# Altium PCB Rotating Dispaly.PcbDoc
Units mm, origin at the board's own origin, x right, y up, seen from the top; angles counter-clockwise.
Board outline 294.3 x 53.8 mm, 2 copper layers (Top Layer, Bottom Layer); 77 components, 100 nets, 307 pads, 34 vias.
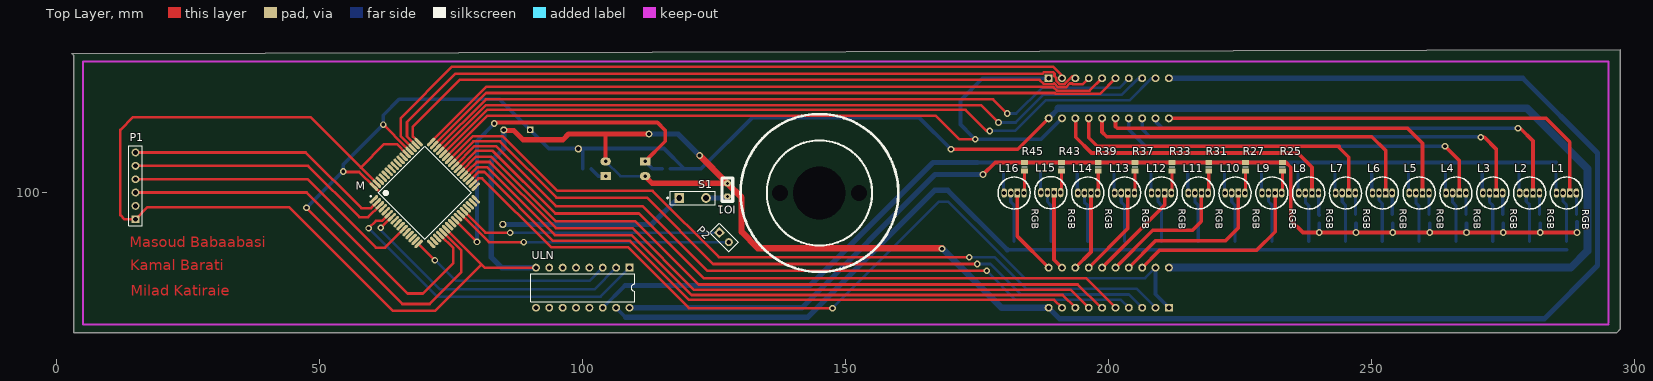
[diagram p0: Top Layer view]
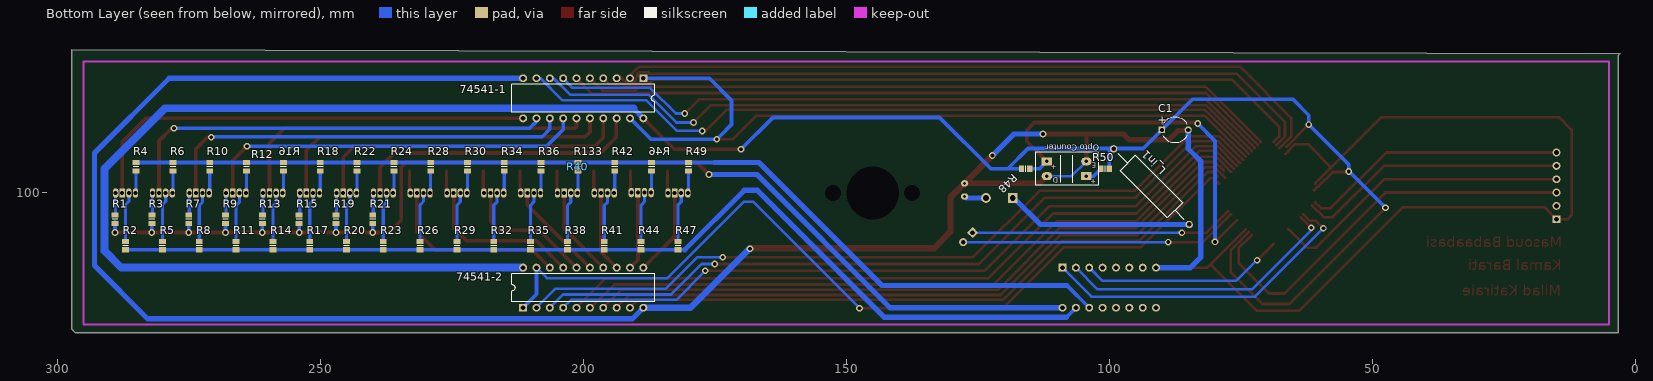
[diagram p1: Bottom Layer view, seen from below]

## Layer stack, top to bottom
Top Solder: solder mask 0.0102, Solder Resist, Dk 3.5
Top Layer: signal copper 0.0356
Dielectric1: dielectric 0.32, FR-4, Dk 4.8
Bottom Layer: signal copper 0.0356
Bottom Solder: solder mask 0.0102, Solder Resist, Dk 3.5

## Board outline
2.9,126.5 3.3,126.1 3.3,73.4 296.5,73.4 297.2,74.1 297.2,127.2

## Design rules (kind name [scope] priority, off if disabled: settings)
Clearance [All] p1: gap=0.12 ignorepadtopadclearanceinfootprint=FALSE except(0: Arc-Hole Track-Hole SMDPad-Hole THPad-Hole Via-Hole Fill-Hole Poly-Hole Region-Hole Text-Hole)
ComponentClearance [All] p1 off: gap=0.254 collisioncheckmode=3 verticalgap=0.254 showdistances=FALSE
PolygonConnect [All] p1: connectstyle=Relief reliefconductorwidth=0.254 reliefentries=4 polygonreliefangle="90 Angle" airgapwidth=0.254
RoomDefinition Schematic [InComponentClass('Schematic')] p1: confinementstyle=ConfineIn formatcopy=TRUE lockcomponents=FALSE outline 4.2,74.6 295.7,74.6 295.7,125.7 4.2,125.7
RoutingVias [All] p1: holewidth=0.6 width=1.2 viastyle="Through Hole" minholewidth=0.5 minwidth=1 maxholewidth=0.7 maxwidth=1.4
SilkToSolderMaskClearance SilkscreenOverComponentPads [IsPad] p1: minsilkscreentomaskgap=0.254 clearancetoexposedcopper=TRUE
SolderMaskExpansion [All] p1: expansion=0.102 istentingtop=FALSE
Width [All] p1: maxlimit=3 minlimit=0.2 preferedwidth=0.5
28 further rules are at their usual default settings.

## Classes and differential pairs
component class Schematic: 74541-1 74541-2 C1 IO1 L1 L2 L3 L4 L5 L6 L7 L8 L9 L10 L11 L12 L13 L14 L15 L16 L_in1 M

## Components (designator, comment, footprint, x,y, rotation, side; value= is the part's Value field where it differs from the comment)
74541-1 "74541(Bufer)" SOT146-1 200,118 r0 bottom
74541-2 "74541(Bufer)" SOT146-1 200,82 r180 bottom
C1 "Cap Pol1" CAPPR5-5x5 87.5,112 r180 bottom
IO1 "I/O Port" I/O 127.508,100.584 r180 top
L1 "RGB LED" "RGB LED" 287,100 r270 top
L2 "RGB LED" "RGB LED" 280,100 r270 top
L3 "RGB LED" "RGB LED" 273,100 r270 top
L4 "RGB LED" "RGB LED" 266,100 r270 top
L5 "RGB LED" "RGB LED" 259,100 r270 top
L6 "RGB LED" "RGB LED" 252,100 r270 top
L7 "RGB LED" "RGB LED" 245,100 r270 top
L8 "RGB LED" "RGB LED" 238,100 r270 top
L9 "RGB LED" "RGB LED" 231,100 r270 top
L10 "RGB LED" "RGB LED" 224,100 r270 top
L11 "RGB LED" "RGB LED" 217,100 r270 top
L12 "RGB LED" "RGB LED" 210,100 r270 top
L13 "RGB LED" "RGB LED" 203,100 r270 top
L14 "RGB LED" "RGB LED" 196,100 r270 top
L15 "RGB LED" "RGB LED" 188.976,100.076 r270 top
L16 "RGB LED" "RGB LED" 182,100 r270 top
L_in1 "Inductor" AXIAL-0.8 92,101.2 r225 bottom
M "AVR micro" 64A_M 70,100 r45 top
"Opto Counter1" "Opto Conter" "Opto Counter" 108.1,104.6 r0 bottom
P1 "Programing" HDR1X6 15,95 r90 top
P2 "USART" HDR1X2 125.984,92.456 r315 top
R1 "Res Semi" RESC2012L 289,95 r90 bottom
R2 "Res Semi" RESC2012L 287,90 r90 bottom
R3 "Res Semi" RESC2012L 282,95 r90 bottom
R4 "Res Semi" RESC2012L 285,105 r270 bottom
R5 "Res Semi" RESC2012L 280,90 r90 bottom
R6 "Res Semi" RESC2012L 278,105 r270 bottom
R7 "Res Semi" RESC2012L 275,95 r90 bottom
R8 "Res Semi" RESC2012L 273,90 r90 bottom
R9 "Res Semi" RESC2012L 268,95 r90 bottom
R10 "Res Semi" RESC2012L 271,105 r270 bottom
R11 "Res Semi" RESC2012L 266,90 r90 bottom
R12 "Res Semi" RESC2012L 264,105 r270 bottom
R13 "Res Semi" RESC2012L 261,95 r90 bottom
R14 "Res Semi" RESC2012L 259,90 r90 bottom
R15 "Res Semi" RESC2012L 254,95 r90 bottom
R16 "Res Semi" RESC2012L 257,105 r270 bottom
R17 "Res Semi" RESC2012L 252,90 r90 bottom
R18 "Res Semi" RESC2012L 250,105 r270 bottom
R19 "Res Semi" RESC2012L 247,95 r90 bottom
R20 "Res Semi" RESC2012L 245,90 r90 bottom
R21 "Res Semi" RESC2012L 240,95 r90 bottom
R22 "Res Semi" RESC2012L 243,105 r270 bottom
R23 "Res Semi" RESC2012L 238,90 r90 bottom
R24 "Res Semi" RESC2012L 236,105 r270 bottom
R25 "Res Semi" RESC2012L 233,105 r270 top
R26 "Res Semi" RESC2012L 231,90 r90 bottom
R27 "Res Semi" RESC2012L 226,105 r270 top
R28 "Res Semi" RESC2012L 229,105 r270 bottom
R29 "Res Semi" RESC2012L 224,90 r90 bottom
R30 "Res Semi" RESC2012L 222,105 r270 bottom
R31 "Res Semi" RESC2012L 219,105 r270 top
R32 "Res Semi" RESC2012L 217,90 r90 bottom
R33 "Res Semi" RESC2012L 212,105 r270 top
R34 "Res Semi" RESC2012L 215,105 r270 bottom
R35 "Res Semi" RESC2012L 210,90 r90 bottom
R36 "Res Semi" RESC2012L 208,105 r270 bottom
R37 "Res Semi" RESC2012L 205,105 r270 top
R38 "Res Semi" RESC2012L 203,90 r90 bottom
R39 "Res Semi" RESC2012L 198,105 r270 top
R40 "Res Semi" RESC2012L 201,105 r270 bottom
R41 "Res Semi" RESC2012L 196,90 r90 bottom
R42 "Res Semi" RESC2012L 194,105 r270 bottom
R43 "Res Semi" RESC2012L 191,105 r270 top
R44 "Res Semi" RESC2012L 189,90 r90 bottom
R45 "Res Semi" RESC2012L 184,105 r270 top
R46 "Res Semi" RESC2012L 187,105 r270 bottom
R47 "Res Semi" RESC2012L 182,90 r90 bottom
R48 "Res Semi" RESC2012L 115.9,104.6 r0 bottom
R49 "Res Semi" RESC2012L 180,105 r270 bottom
R50 "Res Semi" RESC2012L 100.8,104.6 r0 bottom
S1 "SW-SPST" SPST-2 120.904,99.06 r0 top
ULN "ULN2003" A16 100,82 r180 top

## Footprints (in the part's own frame and the unit in brackets; to place one, negate y for a bottom-side part, rotate by r counter-clockwise, add the part's x,y. Pads: shape width x height; smd on the part's side, far side on the other; paste and mask are expansions set on the pad)
64A_M [mm] "Thin QFP, 64-Leads, Body 14x14mm, Pitch 0.8mm, IPC Low Density"
  oval 2.05x0.6 smd: 1(-7.7,6) 2(-7.7,5.2) 3(-7.7,4.4) 4(-7.7,3.6) 5(-7.7,2.8) 6(-7.7,2) 7(-7.7,1.2) 8(-7.7,0.4) 9(-7.7,-0.4) 10(-7.7,-1.2) 11(-7.7,-2) 12(-7.7,-2.8) 13(-7.7,-3.6) 14(-7.7,-4.4) 15(-7.7,-5.2) 16(-7.7,-6) 33(7.7,-6) 34(7.7,-5.2) 35(7.7,-4.4) 36(7.7,-3.6) 37(7.7,-2.8) 38(7.7,-2) 39(7.7,-1.2) 40(7.7,-0.4) 41(7.7,0.4) 42(7.7,1.2) 43(7.7,2) 44(7.7,2.8) 45(7.7,3.6) 46(7.7,4.4) 47(7.7,5.2) 48(7.7,6)
  oval 0.6x2.05 smd: 17(-6,-7.7) 18(-5.2,-7.7) 19(-4.4,-7.7) 20(-3.6,-7.7) 21(-2.8,-7.7) 22(-2,-7.7) 23(-1.2,-7.7) 24(-0.4,-7.7) 25(0.4,-7.7) 26(1.2,-7.7) 27(2,-7.7) 28(2.8,-7.7) 29(3.6,-7.7) 30(4.4,-7.7) 31(5.2,-7.7) 32(6,-7.7) 49(6,7.7) 50(5.2,7.7) 51(4.4,7.7) 52(3.6,7.7) 53(2.8,7.7) 54(2,7.7) 55(1.2,7.7) 56(0.4,7.7) 57(-0.4,7.7) 58(-1.2,7.7) 59(-2,7.7) 60(-2.8,7.7) 61(-3.6,7.7) 62(-4.4,7.7) 63(-5.2,7.7) 64(-6,7.7)
  silkscreen extent -7.82,-6.25 6.25,6.97, body extent -7,-7 7,7, height 1.2
A16 [mm] "DIP; 16 Leads; Row Spacing 7.62 mm; Pitch 2.54 mm"
  rect 1.5x1.5 hole 0.9: 1(-8.89,-3.81)
  round 1.5 hole 0.9: 2(-6.35,-3.81) 3(-3.81,-3.81) 4(-1.27,-3.81) 5(1.27,-3.81) 6(3.81,-3.81) 7(6.35,-3.81) 8(8.89,-3.81) 9(8.89,3.81) 10(6.35,3.81) 11(3.81,3.81) 12(1.27,3.81) 13(-1.27,3.81) 14(-3.81,3.81) 15(-6.35,3.81) 16(-8.89,3.81)
  silkscreen extent -9.85,-2.65 9.85,2.65
AXIAL-0.8 [mm]
  round 1.4 hole 0.85: 1(-10.16,0) 2(10.16,0)
  silkscreen extent -8.89,-2.03 8.89,2.03
CAPPR5-5x5 [mm] "Capacitor, Electrolytic, Radial; Body 5 x 5 mm (Dia.xH typ); Pin Spacing 5 mm (typ)"
  rect 1.25x1.25 hole 0.75: 1(-2.5,0)
  round 1.35 hole 0.8: 2(2.5,0)
  silkscreen extent -2.26,-2.5 2.27,2.5
HDR1X2 [mm] "Connector; Header; 2 Position"
  rect 1.5x1.5 hole 0.9: 1(0,0)
  round 1.5 hole 0.9: 2(2.54,0)
  silkscreen extent -1.27,-1.27 3.81,1.27
HDR1X6 [mm] "Connector; Header; 6 Position"
  rect 1.5x1.5 hole 0.9: 1(0,0)
  round 1.5 hole 0.9: 2(2.54,0) 3(5.08,0) 4(7.62,0) 5(10.16,0) 6(12.7,0)
  silkscreen extent -1.27,-1.27 13.97,1.27
I/O [mm]
  oval 1.4x1.2 hole 0.6: 1(0,1.25) 2(0,-1.25)
  silkscreen extent -1,-2.29 1,2.16
"Opto Counter" [mm]
  rect 2x1.5 hole 0.65: 1(-3.75,1.4) 3(3.75,-1.4)
  oval 2x1.5 hole 0.65: 2(-3.75,-1.4) 4(3.75,1.4)
  silkscreen extent -6,-3.15 6,3.15
RESC2012L [mm] "Chip Resistor, Body 2.0x1.3mm, IPC High Density"
  rect 1x1.3 smd: 1(-0.8,0) 2(0.8,0)
  silkscreen extent 0,-0.55 0,0.55, body extent -1.07,-0.7 1.07,0.7, height 2.54
"RGB LED" [mm]
  oval 1.8x1.02 hole 0.762: 1(0,1.88) 3(0,-0.63) 4(0,-1.88)
  rect 1.8x1.02 hole 0.762: 2(0,0.63)
  silkscreen extent -3.05,-3.05 3.05,3.05
SOT146-1 [mm] "DIP; 20 Leads; Row Spacing 7.62 mm; Pitch 2.54 mm"
  rect 1.5x1.5 hole 0.9: 1(-11.43,-3.81)
  round 1.5 hole 0.9: 2(-8.89,-3.81) 3(-6.35,-3.81) 4(-3.81,-3.81) 5(-1.27,-3.81) 6(1.27,-3.81) 7(3.81,-3.81) 8(6.35,-3.81) 9(8.89,-3.81) 10(11.43,-3.81) 11(11.43,3.81) 12(8.89,3.81) 13(6.35,3.81) 14(3.81,3.81) 15(1.27,3.81) 16(-1.27,3.81) 17(-3.81,3.81) 18(-6.35,3.81) 19(-8.89,3.81) 20(-11.43,3.81)
  silkscreen extent -13.6,-2.65 13.6,2.65
SPST-2 [mm] "Circuit Breaker; 2 Leads"
  rect 1.85x1.85 hole 1.1: 1(-2.54,0)
  round 1.85 hole 1.1: 2(2.54,0)
  silkscreen extent -4.89,-1.27 4.28,1.27

## Part data
C1: "Polarized Capacitor (Radial)"
M: library part ATmega64
"Opto Counter1": library part "Opto Counter"
P1: library part "Header 6", "Header, 6-Pin"
P2: library part "Header 2", "Header, 2-Pin"
R1 R2 R3 R4 R5 R6 R7 R8 R9 R10 R11 R12 R13 R14 R15 R16 R17 R18 R19 R20 R21 R22 R23 R24 R25 R26 R27 R28 R29 R30 R31 R32 R33 R34 R35 R36 R37 R38 R39 R40 R41 R42 R43 R44 R45 R46 R47 R48 R49 R50: "Semiconductor Resistor"
S1: "Single-Pole, Single-Throw Switch"

## Free pads (board coordinates)
  round 0 hole 10: 0(145,100)
  round 0 hole 3: 1(152.5,100) 2(137.5,100)

## Via types
v1: diameter 1.27, hole 0.711, Top Layer to Bottom Layer, 34 vias

## Nets (pads, with @x,y where several pads share a name; then routed paths per layer and width w, separated by ;. In a path a pad name is that pad's centre, name@x,y a point inside that pad or via, vN(x,y) a via of type N, cw(c..) or ccw(c..) an arc to the next point about the centre after c; other vN are vias at no path point)
B: R4.1 R6.1 R10.1 R12.1 R16.1 R18.1 R22.1 R24.1 R28.1 R30.1 R34.1 R36.1 R40.1 R42.1 R46.1 R49.1 ULN.14 | length 192.6
  Bottom Layer w0.7: ULN.14 108.02,82.4 ; 175,105.8 R49.1 R42.1 R22.1 R18.1 R16.1 R12.1 R10.1 R6.1 R4.1
  Bottom Layer w1: 108.02,82.4 143.2,82.4 166.6,105.8 175,105.8
BD: M.16 ULN.3 | length 39
  Top Layer w0.5: M.16 v1@71.905,87.205
  Bottom Layer w0.5: v1@71.9,87.3 75.9,83.3 101.3,83.3 ULN.3
  other v1: 71.9,87.2
G: R2.1 R5.1 R8.1 R11.1 R14.1 R17.1 R20.1 R23.1 R26.1 R29.1 R32.1 R35.1 R38.1 R41.1 R44.1 R47.1 ULN.15 | length 196.1
  Bottom Layer w0.7: ULN.15 108.14,76.4 ; 180.7,89.2 R47.1 R44.1 R41.1 R38.1 R35.1 R32.1 R29.1 R26.1 R23.1 R20.1 R17.1 R14.1 R11.1 R8.1 R5.1 R2.1
  Bottom Layer w1: 108.14,76.4 142.8,76.4 166.9,100.5 169.4,100.5 180.7,89.2
GD: M.7 ULN.2 | length 54.4
  Top Layer w0.5: v1(61.6,93.4) 61.632,93.4 M.7@63.636,95.404
  Bottom Layer w0.5: v1(61.6,93.4) 61.6,93 72.9,81.7 102.24,81.7 ULN.2
GND: 74541-1.10 74541-2.10 "Opto Counter1.2" "Opto Counter1.4" C1.2 IO1.2 M.22 M.53 M.63 P1.1 ULN.8 | length 589
  Top Layer w0.5: M.63 57.811,104.836 ; M.53 64.68,109.28 62.255,109.28 57.811,104.836 ; M.22 81.362,85.81 ULN.8 ; 80.736,86.436 71.9,77.6 63.9,77.6 44.2,97.3 17.3,97.3 P1.1 12.9,95 12.1,95.8 12.1,112 14.5,114.4 48.246,114.4 57.811,104.836 ; 104.35,111.15 104.45,111.15
  Top Layer w0.7: 104.35,106 104.35,111.15
  Top Layer w1: C1.2@85.4,111.9 86.9,111.9 88.7,110.1 96.2,110.1 97.3,111.2 v1(112.6,111.2) ; 111.85,103.2 113.216,101.834 IO1.2
  Top Layer w1.2: v1(122.221,107.121) IO1.2 130.2,99.142 130.2,92.6 133.3,89.5 v1@168.3,89.5
  Bottom Layer w0.5: 104.35,106 107.15,103.2 111.85,103.2
  Bottom Layer w1: C1.2 85,108.4 82.6,106 82.6,87.8 84.59,85.81 ULN.8 ; v1(112.6,111.2) 118.142,111.2 v1(122.221,107.121) ; 74541-2.10 190.66,76.1 282.8,76.1 292.9,86.2 292.9,107.6 278.69,121.81 74541-1.10
  Bottom Layer w1.2: v1@168.35,89.45 179.61,78.19 74541-2.10
  other v1: 168.3,89.4
L5: 74541-1.15 L5.2 | length 70.7
  Top Layer w0.7: 74541-1.15 201.27,112.63 201.6,112.3 256.8,112.3 259.63,109.47 L5.2
L6: 74541-1.16 L6.2 | length 66
  Top Layer w0.7: 74541-1.16 198.73,111.57 199.6,110.7 250,110.7 252.63,108.07 L6.2
L8: 74541-1.18 L8.2 | length 55.8
  Top Layer w0.7: 74541-1.18 193.7,114.14 193.7,110.6 196.7,107.6 235.9,107.6 238.63,104.87 L8.2
MISO: M.3 P1.5 | length 51.4
  Top Layer w0.5: P1.5 47.817,105.16 57.577,95.4 59.177,95.4 M.3
MOSI: M.2 P1.6 | length 50.7
  Top Layer w0.5: P1.6 47.346,107.7 57.946,97.1 59.746,97.1 M.2
Net74541-1_1: 74541-1.1 74541-1.19 M.43 | length 150.9
  Top Layer w0.5: M.43 81.872,114.7 167.1,114.7 171.6,110.2 v1(174.6,110.2)
  Bottom Layer w0.5: 174,110.8 v1(174.6,110.2)
  Bottom Layer w0.7: 174,110.8 171.8,113 171.8,117.6 176.01,121.81 74541-1.1 ; v1(174.6,110.2) 187.12,110.2 74541-1.19
Net74541-1_2: 74541-1.2 M.51 | length 137.5
  Top Layer w0.5: M.51 65.4,110.823 65.4,114.2 75.2,124 189.4,124 191.11,122.29 74541-1.2
Net74541-1_3: 74541-1.3 M.50 | length 138.4
  Top Layer w0.5: M.50 66.6,110.754 66.6,113.5 75.8,122.7 187.437,122.7 187.667,122.93 189.473,122.93 189.69,122.713 189.69,122.2 189.99,121.9 189.99,121.346 190.646,120.69 191.574,120.69 193.084,122.2 193.26,122.2 74541-1.3
Net74541-1_4: 74541-1.4 M.49 | length 137.1
  Top Layer w0.5: M.49 68.756,109.687 67.7,110.744 67.7,112.6 76.6,121.5 186.857,121.5 187.667,120.69 189.473,120.69 189.603,120.82 189.639,120.82 190.389,120.07 191.831,120.07 192.561,120.8 193.076,120.8 193.186,120.69 195.07,120.69 74541-1.4
Net74541-1_5: 74541-1.5 M.48 | length 133.2
  Top Layer w0.5: M.48 81.715,120.2 187.28,120.2 187.41,120.07 189.512,120.07 190.132,119.45 196.37,119.45 74541-1.5
Net74541-1_6: 74541-1.6 M.47 | length 134.9
  Top Layer w0.5: M.47 81.646,119 189.706,119 189.876,118.83 198.29,118.83 74541-1.6
Net74541-1_7: 74541-1.7 M.46 | length 139.2
  Top Layer w0.5: M.46 81.577,117.8 178,117.8 v1(180.7,115.1)
  Bottom Layer w0.5: v1(180.7,115.1) 182.4,115.1 187.3,120 202,120 74541-1.7
Net74541-1_8: 74541-1.8 M.45 | length 141.9
  Top Layer w0.5: M.45 81.609,116.7 175.75,116.7 v1(179.05,113.4)
  Bottom Layer w0.5: v1(179.05,113.4) 182.3,113.4 187.6,118.7 202.5,118.7 205.61,121.81 74541-1.8
Net74541-1_9: 74541-1.9 M.44 | length 145
  Top Layer w0.5: M.44 81.84,115.8 172.774,115.8 176.774,111.8 177.087,112.113 v1(177.4,111.8)
  Bottom Layer w0.5: v1(177.4,111.8) 182.2,111.8 188,117.6 203.9,117.6 208.11,121.81 74541-1.9
Net74541-1_11: 74541-1.11 L1.2 | length 87.7
  Top Layer w0.7: 74541-1.11 283.11,114.19 287.63,109.67 L1.2
Net74541-1_12: 74541-1.12 L2.2 | length 83.8
  Top Layer w0.7: v1(277.8,112.3) 278.2,112.3 280.63,109.87 L2.2
  Bottom Layer w0.7: 74541-1.12 208.89,113.61 210.2,112.3 v1@277.9,112.3
Net74541-1_13: 74541-1.13 L3.2 | length 79.2
  Top Layer w0.7: v1(270.7,110.6) 271.4,110.6 273.63,108.37 L3.2
  Bottom Layer w0.7: 74541-1.13 206.35,112.15 207.8,110.7 v1@270.7,110.7
Net74541-1_14: 74541-1.14 L4.2 | length 73.5
  Top Layer w0.7: v1(263.9,108.9) 266.63,106.17 L4.2
  Bottom Layer w0.7: 74541-1.14 203.81,112.09 207,108.9 v1(263.9,108.9)
Net74541-1_17: 74541-1.17 L7.2 | length 61.4
  Top Layer w0.7: 74541-1.17 196.19,110.51 198.1,108.6 ; 198.1,108.9 243.8,108.9 ; 243.8,108.6 245.63,106.77 L7.2
Net74541-2_1: 74541-2.1 74541-2.19 M.34 | length 164.3
  Top Layer w0.5: M.34 80.154,102.8 80.9,102.8 94,89.7 108.6,89.7 120.2,78.1 v1(147.5,78.1)
  Bottom Layer w0.5: v1(147.5,78.1) 167.735,98.335 169.465,98.335 184,83.8 206.88,83.8 74541-2.19
  Bottom Layer w0.7: 74541-2.19 208.89,80.73 74541-2.1
Net74541-2_2: 74541-2.2 M.42 | length 149.7
  Top Layer w0.5: M.42 79.103,110.8 84.8,110.8 95.2,100.4 113.3,100.4 125.9,87.8 v1(173.5,87.8)
  Bottom Layer w0.5: v1@173.6,88 173.8,87.8 178.3,87.8 184.3,81.8 205.28,81.8 74541-2.2
Net74541-2_3: 74541-2.3 M.41 | length 146.3
  Top Layer w0.5: M.41 79.234,109.8 84.3,109.8 95,99.1 112.2,99.1 124.8,86.5 174.6,86.5 v1@175,86.9
  Bottom Layer w0.5: v1@175,86.9 175.4,86.5 177.5,86.5 183.3,80.7 203.84,80.7 74541-2.3
  other v1: 175,86.5
Net74541-2_4: 74541-2.4 M.40 | length 142.1
  Top Layer w0.5: M.40 79.466,108.9 83.5,108.9 94.9,97.5 111.4,97.5 123.7,85.2 v1(176.8,85.2)
  Bottom Layer w0.5: v1@177,85 182.3,79.7 202.3,79.7 74541-2.4
Net74541-2_5: 74541-2.5 M.39 | length 138.7
  Top Layer w0.5: M.39 79.697,108 82.9,108 94.8,96.1 110.7,96.1 123,83.8 195.66,83.8 74541-2.5
Net74541-2_6: 74541-2.6 M.38 | length 135
  Top Layer w0.5: M.38 79.728,106.9 82.6,106.9 94.9,94.6 110,94.6 122,82.6 194.1,82.6 198.51,78.19 74541-2.6
Net74541-2_7: 74541-2.7 M.37 | length 130.1
  Top Layer w0.5: 78.222,104.262 79.86,105.9 82.3,105.9 94.9,93.3 109.5,93.3 121.2,81.6 192.78,81.6 74541-2.7
Net74541-2_8: 74541-2.8 M.36 | length 127.6
  Top Layer w0.5: M.36 79.991,104.9 81.8,104.9 94.7,92 109.3,92 120.7,80.6 191.24,80.6 74541-2.8
Net74541-2_9: 74541-2.9 M.35 | length 122.8
  Top Layer w0.5: 79.353,103.13 80.223,104 81.3,104 94.4,90.9 109,90.9 120.2,79.7 189.6,79.7 74541-2.9
Net74541-2_11: 74541-2.11 L16.2 | length 16.7
  Top Layer w0.7: L16.2 182.63,91.75 74541-2.11
Net74541-2_12: 74541-2.12 L15.2 | length 14.9
  Top Layer w0.7: L15.2 189.606,87.314 74541-2.12 74541-2.12@191.12,85.8
Net74541-2_13: 74541-2.13 L14.2 | length 15.4
  Top Layer w0.7: 74541-2.13 196.63,88.79 L14.2
Net74541-2_14: 74541-2.14 L13.2 | length 17.3
  Top Layer w0.7: 74541-2.14 203.63,93.25 L13.2
Net74541-2_15: 74541-2.15 L12.2 | length 19.1
  Top Layer w0.7: 74541-2.15 210.63,97.71 L12.2
Net74541-2_16: 74541-2.16 L11.2 | length 25.4
  Top Layer w0.7: 74541-2.16 208.36,92.9 215.9,92.9 217.6,94.6 217.6,99.97 L11.2
Net74541-2_17: 74541-2.17 L10.2 | length 30.6
  Top Layer w0.7: 74541-2.17 208.9,90.9 222.2,90.9 224.63,93.33 L10.2
Net74541-2_18: 74541-2.18 L9.2 | length 35.5
  Top Layer w0.7: 74541-2.18 209.64,89.1 228.1,89.1 231.63,92.63 L9.2
NetIO1_1: IO1.1 S1.2 | length 3.8
  Bottom Layer w1: S1.2 IO1.1@127.234,99.06
NetL1_1: L1.1 R1.2 | length 4.1
  Bottom Layer w0.6: R1.2@288.88,95.92 L1.1
NetL1_3: L1.3 R2.2 | length 9.5
  Bottom Layer w0.6: L1.3 286.37,98.37 287,97.74 R2.2
NetL1_4: L1.4 R4.2 | length 4.1
  Bottom Layer w0.6: L1.4@285,100.12 R4.2
NetL2_1: L2.1 R3.2 | length 4.1
  Bottom Layer w0.6: R3.2@281.88,95.92 L2.1
NetL2_3: L2.3 R5.2 | length 9.5
  Bottom Layer w0.6: L2.3 279.37,98.37 280,97.74 R5.2
NetL2_4: L2.4 R6.2 | length 4.1
  Bottom Layer w0.6: L2.4@278,100.12 R6.2
NetL3_1: L3.1 R7.2 | length 4.1
  Bottom Layer w0.6: R7.2@274.88,95.92 L3.1
NetL3_3: L3.3 R8.2 | length 9.5
  Bottom Layer w0.6: L3.3 272.37,98.27 273,97.64 R8.2
NetL3_4: L3.4 R10.2 | length 4.1
  Bottom Layer w0.6: L3.4@271,100.12 R10.2
NetL4_1: L4.1 R9.2 | length 4.1
  Bottom Layer w0.6: R9.2@267.88,95.92 L4.1
NetL4_3: L4.3 R11.2 | length 9.5
  Bottom Layer w0.6: L4.3 265.37,98.23 266,97.6 R11.2
NetL4_4: L4.4 R12.2 | length 4.1
  Bottom Layer w0.6: L4.4@264,100.12 R12.2
NetL5_1: L5.1 R13.2 | length 4.1
  Bottom Layer w0.6: R13.2@260.88,95.92 L5.1
NetL5_3: L5.3 R14.2 | length 9.5
  Bottom Layer w0.6: L5.3 258.37,98.13 259,97.5 R14.2
NetL5_4: L5.4 R16.2 | length 4.1
  Bottom Layer w0.6: L5.4@257,100.12 R16.2
NetL6_1: L6.1 R15.2 | length 4.1
  Bottom Layer w0.6: R15.2@253.88,95.92 L6.1
NetL6_3: L6.3 R17.2 | length 9.5
  Bottom Layer w0.6: L6.3 251.37,98.63 252,98 R17.2
NetL6_4: L6.4 R18.2 | length 4.1
  Bottom Layer w0.6: L6.4@250,100.12 R18.2
NetL7_1: L7.1 R19.2 | length 4.1
  Bottom Layer w0.6: R19.2@246.88,95.92 L7.1
NetL7_3: L7.3 R20.2 | length 9.5
  Bottom Layer w0.6: L7.3 244.37,98.33 245,97.7 R20.2
NetL7_4: L7.4 R22.2 | length 4.1
  Bottom Layer w0.6: L7.4@243,100.12 R22.2
NetL8_1: L8.1 R21.2 | length 4.2
  Bottom Layer w0.7: L8.1 239.94,99.94 239.94,95.86 R21.2
NetL8_3: L8.3 R23.2 | length 9.5
  Bottom Layer w0.6: L8.3 237.37,98.23 238,97.6 R23.2
NetL8_4: L8.4 R24.2 | length 4.1
  Bottom Layer w0.6: L8.4@236,100.12 R24.2
NetL9_1: L9.1 R25.2 | length 4.1
  Top Layer w0.6: L9.1@233,100.12 R25.2
NetL9_3: L9.3 R26.2 | length 9.5
  Bottom Layer w0.6: L9.3 230.37,98.37 231,97.74 R26.2
NetL9_4: L9.4 R28.2 | length 4.1
  Bottom Layer w0.6: L9.4@229,100.12 R28.2
NetL10_1: L10.1 R27.2 | length 4.1
  Top Layer w0.6: L10.1@226,100.12 R27.2
NetL10_3: L10.3 R29.2 | length 9.5
  Bottom Layer w0.6: L10.3 223.37,98.33 224,97.7 R29.2
NetL10_4: L10.4 R30.2 | length 4.1
  Bottom Layer w0.6: L10.4@222,100.12 R30.2
NetL11_1: L11.1 R31.2 | length 4.1
  Top Layer w0.6: L11.1@219,100.12 R31.2
NetL11_3: L11.3 R32.2 | length 9.5
  Bottom Layer w0.6: L11.3 216.37,98.33 217,97.7 R32.2
NetL11_4: L11.4 R34.2 | length 4.1
  Bottom Layer w0.6: L11.4@215,100.12 R34.2
NetL12_1: L12.1 R33.2 | length 4.1
  Top Layer w0.6: L12.1@212,100.12 R33.2
NetL12_3: L12.3 R35.2 | length 9.5
  Bottom Layer w0.6: L12.3 209.37,98.33 210,97.7 R35.2
NetL12_4: L12.4 R36.2 | length 4.1
  Bottom Layer w0.6: L12.4@208,100.12 R36.2
NetL13_1: L13.1 R37.2 | length 4.1
  Top Layer w0.6: L13.1@205,100.12 R37.2
NetL13_3: L13.3 R38.2 | length 9.5
  Bottom Layer w0.6: L13.3 202.37,98.27 203,97.64 R38.2
NetL13_4: L13.4 R40.2 | length 4.1
  Bottom Layer w0.6: L13.4@201,100.12 R40.2
NetL14_1: L14.1 R39.2 | length 4.1
  Top Layer w0.6: L14.1@198,100.12 R39.2
NetL14_3: L14.3 R41.2 | length 9.5
  Bottom Layer w0.6: L14.3 195.37,98.27 196,97.64 R41.2
NetL14_4: L14.4 R42.2 | length 4.1
  Bottom Layer w0.6: L14.4@194,100.12 R42.2
NetL15_1: L15.1 R43.2 | length 4
  Top Layer w0.6: L15.1@191,100.22 R43.2
NetL15_3: L15.3 R44.2 | length 9.5
  Bottom Layer w0.6: L15.3 188.346,98.354 189,97.7 R44.2
NetL15_4: L15.4 R46.2 | length 4
  Bottom Layer w0.6: L15.4@187,100.172 R46.2
NetL16_1: L16.1 R45.2 | length 4.1
  Top Layer w0.6: L16.1@184,100.12 R45.2
NetL16_3: L16.3 R47.2 | length 9.5
  Bottom Layer w0.6: L16.3 181.37,98.33 182,97.7 R47.2
NetL16_4: L16.4 R49.2 | length 4.1
  Bottom Layer w0.6: L16.4@180,100.12 R49.2
NetL_in1_2: L_in1.2 S1.1 | length 35.9
  Bottom Layer w1: L_in1.2@84.6,93.8 L_in1.2 113.096,94.016 S1.1@118.252,99.172
NetM_25: "Opto Counter1.3" M.25 R48.1 | length 74.6
  Top Layer w0.5: M.25 v1@79.866,90.7
  Top Layer w0.7: v1@79.866,90.7 v1(79.9,90.7) ; v1@83,113.4 114.2,113.4 115.7,111.9 115.7,109.85 111.85,106
  Bottom Layer w0.7: v1@79.9,90.5 v1(79.9,90.7) 79.9,109.9 v1(83.2,113.2) ; 111.85,106 113.25,104.6 R48.1
NetM_27: M.27 P2.2 | length 53.1
  Top Layer w0.5: M.27 82.168,90.66 v1(88.8,90.66)
  Bottom Layer w0.5: v1(88.8,90.66) P2.2
NetM_28: M.28 P2.1 | length 50.2
  Top Layer w0.5: M.28 81.504,92.456 v1(86.2,92.456)
  Bottom Layer w0.5: v1(86.2,92.456) P2.1
"NetOpto Counter1_1": "Opto Counter1.1" R50.2 | length 3.3
  Bottom Layer w0.7: R50.2 103,103.2 104.35,103.2
R: R1.1 R3.1 R7.1 R9.1 R13.1 R15.1 R19.1 R21.1 R25.1 R27.1 R31.1 R33.1 R37.1 R39.1 R43.1 R45.1 ULN.16 | length 217.1
  Top Layer w0.7: v1(176.1,103.5) 178.4,105.8 R27.1 R25.1 233.7,105.8 234.6,104.9 234.6,94.8 236.9,92.5 v1(240,92.5) v1(247,92.5) v1(254,92.5) v1(261,92.5) v1(268,92.5) v1(275,92.5) v1(282,92.5) v1(289,92.5)
  Bottom Layer w0.7: v1(240,92.5) R21.1 ; v1(247,92.5) R19.1 ; v1(254,92.5) R15.1 ; v1(261,92.5) R13.1 ; v1(268,92.5) R9.1 ; v1(275,92.5) R7.1 ; v1(282,92.5) R3.1 ; v1(289,92.5) R1.1 R1.1@289,94.5
  Bottom Layer w1: ULN.16@108.7,78.19 141.69,78.19 167,103.5 v1(176.1,103.5)
RD: M.6 ULN.1 | length 62.2
  Top Layer w0.5: v1(59.3,93.3) 60.7,94.7 61.872,94.7 M.6
  Bottom Layer w0.5: v1(59.3,93.3) 72.3,80.3 103.38,80.3 ULN.1
RESET: M.20 P1.3 | length 77.1
  Top Layer w0.5: P1.3 47.52,100.08 66.7,80.9 69.6,80.9 75.4,86.7 75.4,89.509 M.20
SCK: M.11 P1.4 | length 57.8
  Top Layer w0.5: P1.4 47.68,102.62 60.7,89.6 62.428,89.6 M.11
VCC: 74541-1.20 74541-2.20 C1.1 L_in1.1 M.21 M.52 M.64 R48.2 R50.1 | length 439.3
  Top Layer w0.5: v1@47.5,97.1 65.7,78.9 70.9,78.9 76.9,84.9 76.9,89.14 M.21 ; v1@54.5,104 57.515,104 M.64 60.383,101.202 61.08,100.505 ; v1@62.1,112.991 66.304,108.787
  Top Layer w0.7: v1@62.1,112.991 v1(62.1,113) ; v1(170,108.3) 182.68,108.3 74541-1.20
  Bottom Layer w0.7: v1(47.5,97.2) v1@54.45,104.15 ; v1(54.5,104.1) 54.5,105.4 v1(62.1,113) 62.1,114.8 65.1,117.8 84.2,117.8 93.553,108.447 100,108.447 ; R50.1 100,108.447 ; R48.2 119.29,104.6 ; 119.3,104.59 119.29,104.6 ; v1(170,108.3) 163.942,114.358 132.253,114.358 122.495,104.6 119.29,104.6 ; 100,108.447 115.443,108.447 119.29,104.6
  Bottom Layer w1: 74541-1.20 190.48,116.1
  Bottom Layer w1.5: 190.48,116.1 279.5,116.1 291,104.6 291,89 287.81,85.81 74541-2.20
pads on no net: M.1 M.4 M.5 M.8 M.9 M.10 M.12 M.13 M.14 M.15 M.17 M.18 M.19 M.23 M.24 M.26 M.29 M.30 M.31 M.32 M.33 M.54 M.55 M.56 M.57 M.58 M.59 M.60 M.61 M.62 P1.2 ULN.4 ULN.5 ULN.6 ULN.7 ULN.9 ULN.10 ULN.11 ULN.12 ULN.13

## Keep-outs
Keep-Out Layer:
  lines w0.4: 295,75 5,75 5,125 295,125 295,75.254

## Other copper
Top Layer:
  text "Masoud Babaabasi" at 13.9,89.7 h2
  text "Kamal Barati" at 14,85.3 h2
  text "Milad Katiraie" at 14.1,80.5 h2

## Silkscreen, mask and mechanical layers (free items; w line width, h text height)
Top Overlay:
  circle w0.5: c145,100 r15
  circle w0.4: c145,100 r10
Bottom Overlay:
  text "R133" at 201.8,107.2 h1.52

## Text inside footprints (layer, text, board x,y; h text height)
C1: Bottom Overlay "+" at 90.764,113.148 h1.5
L1: Top Overlay "RGB" at 290,96.924 h1.3 r270
L2: Top Overlay "RGB" at 283.35,97 h1.3 r270
L3: Top Overlay "RGB" at 276.35,97 h1.3 r270
L4: Top Overlay "RGB" at 269.35,97 h1.3 r270
L5: Top Overlay "RGB" at 262.35,97 h1.3 r270
L6: Top Overlay "RGB" at 255.35,97 h1.3 r270
L7: Top Overlay "RGB" at 248.35,97 h1.3 r270
L8: Top Overlay "RGB" at 241.35,97 h1.3 r270
L9: Top Overlay "RGB" at 234.35,97 h1.3 r270
L10: Top Overlay "RGB" at 227.35,97 h1.3 r270
L11: Top Overlay "RGB" at 220.35,97 h1.3 r270
L12: Top Overlay "RGB" at 213.35,97 h1.3 r270
L13: Top Overlay "RGB" at 206.35,97 h1.3 r270
L14: Top Overlay "RGB" at 199.35,97 h1.3 r270
L15: Top Overlay "RGB" at 192.326,97 h1.3 r270
L16: Top Overlay "RGB" at 185.35,97 h1.3 r270
"Opto Counter1": Bottom Overlay "Opto Counter" at 101.942,109.178 h1.1 r180; Bottom Overlay "+" at 102.45,102.65 h1 r180; Bottom Overlay "+" at 109.95,105.4 h1 r180; Bottom Overlay "D" at 109.75,102.85 h1 r180; Bottom Overlay "E" at 102.5,105.75 h1 r180